# Altium PCB PCB1.PcbDoc
Units mil, origin at the board's own origin, x right, y up, seen from the top; angles counter-clockwise.
Board outline 3149.61 x 2952.76 mil, 2 copper layers (Top Layer, Bottom Layer); 97 components, 51 nets, 233 pads, 52 vias.
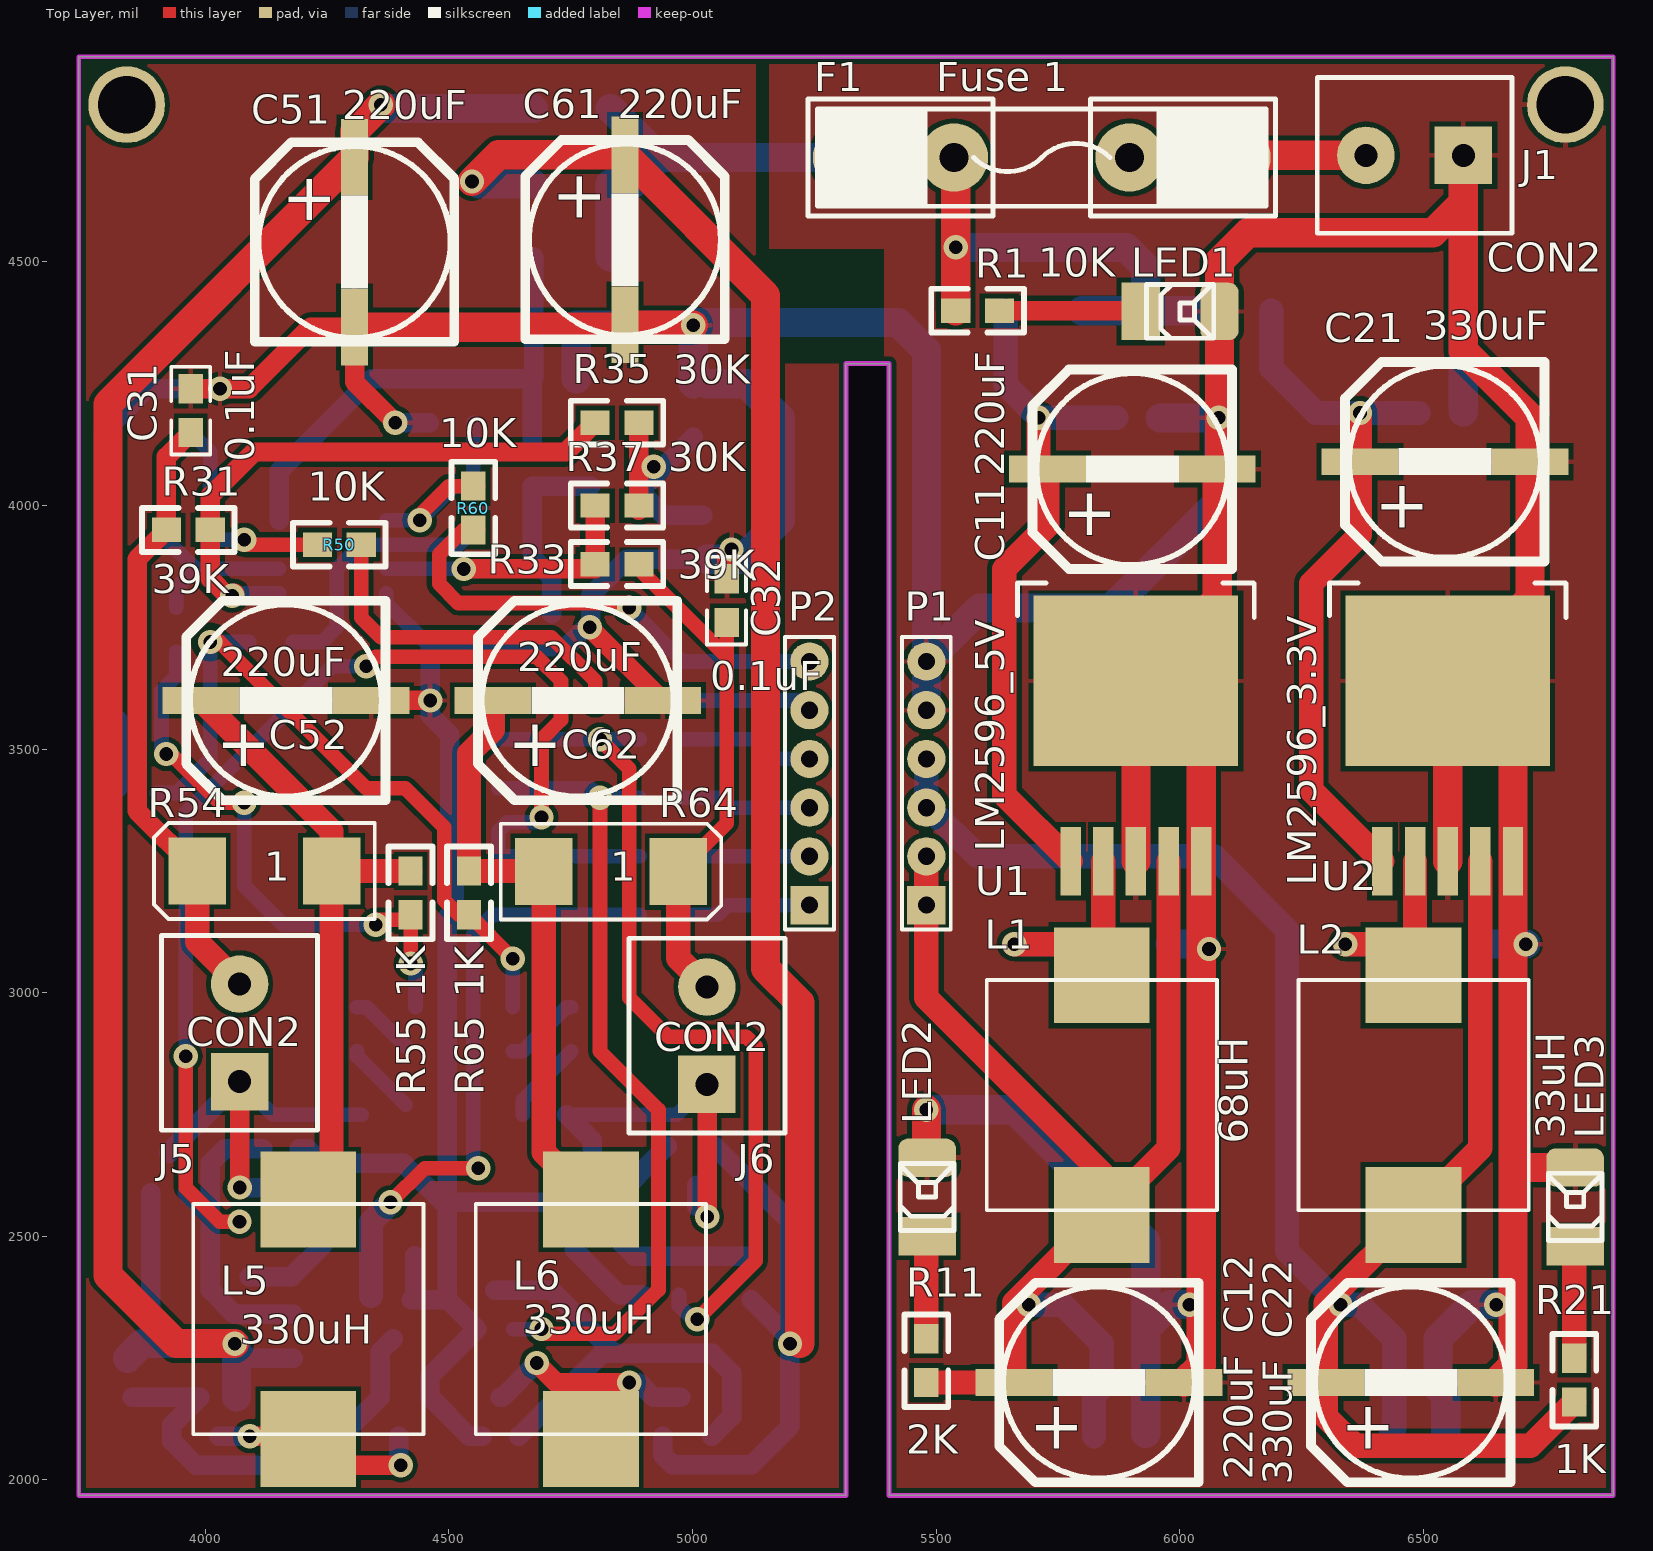
[diagram p0: Top Layer view]
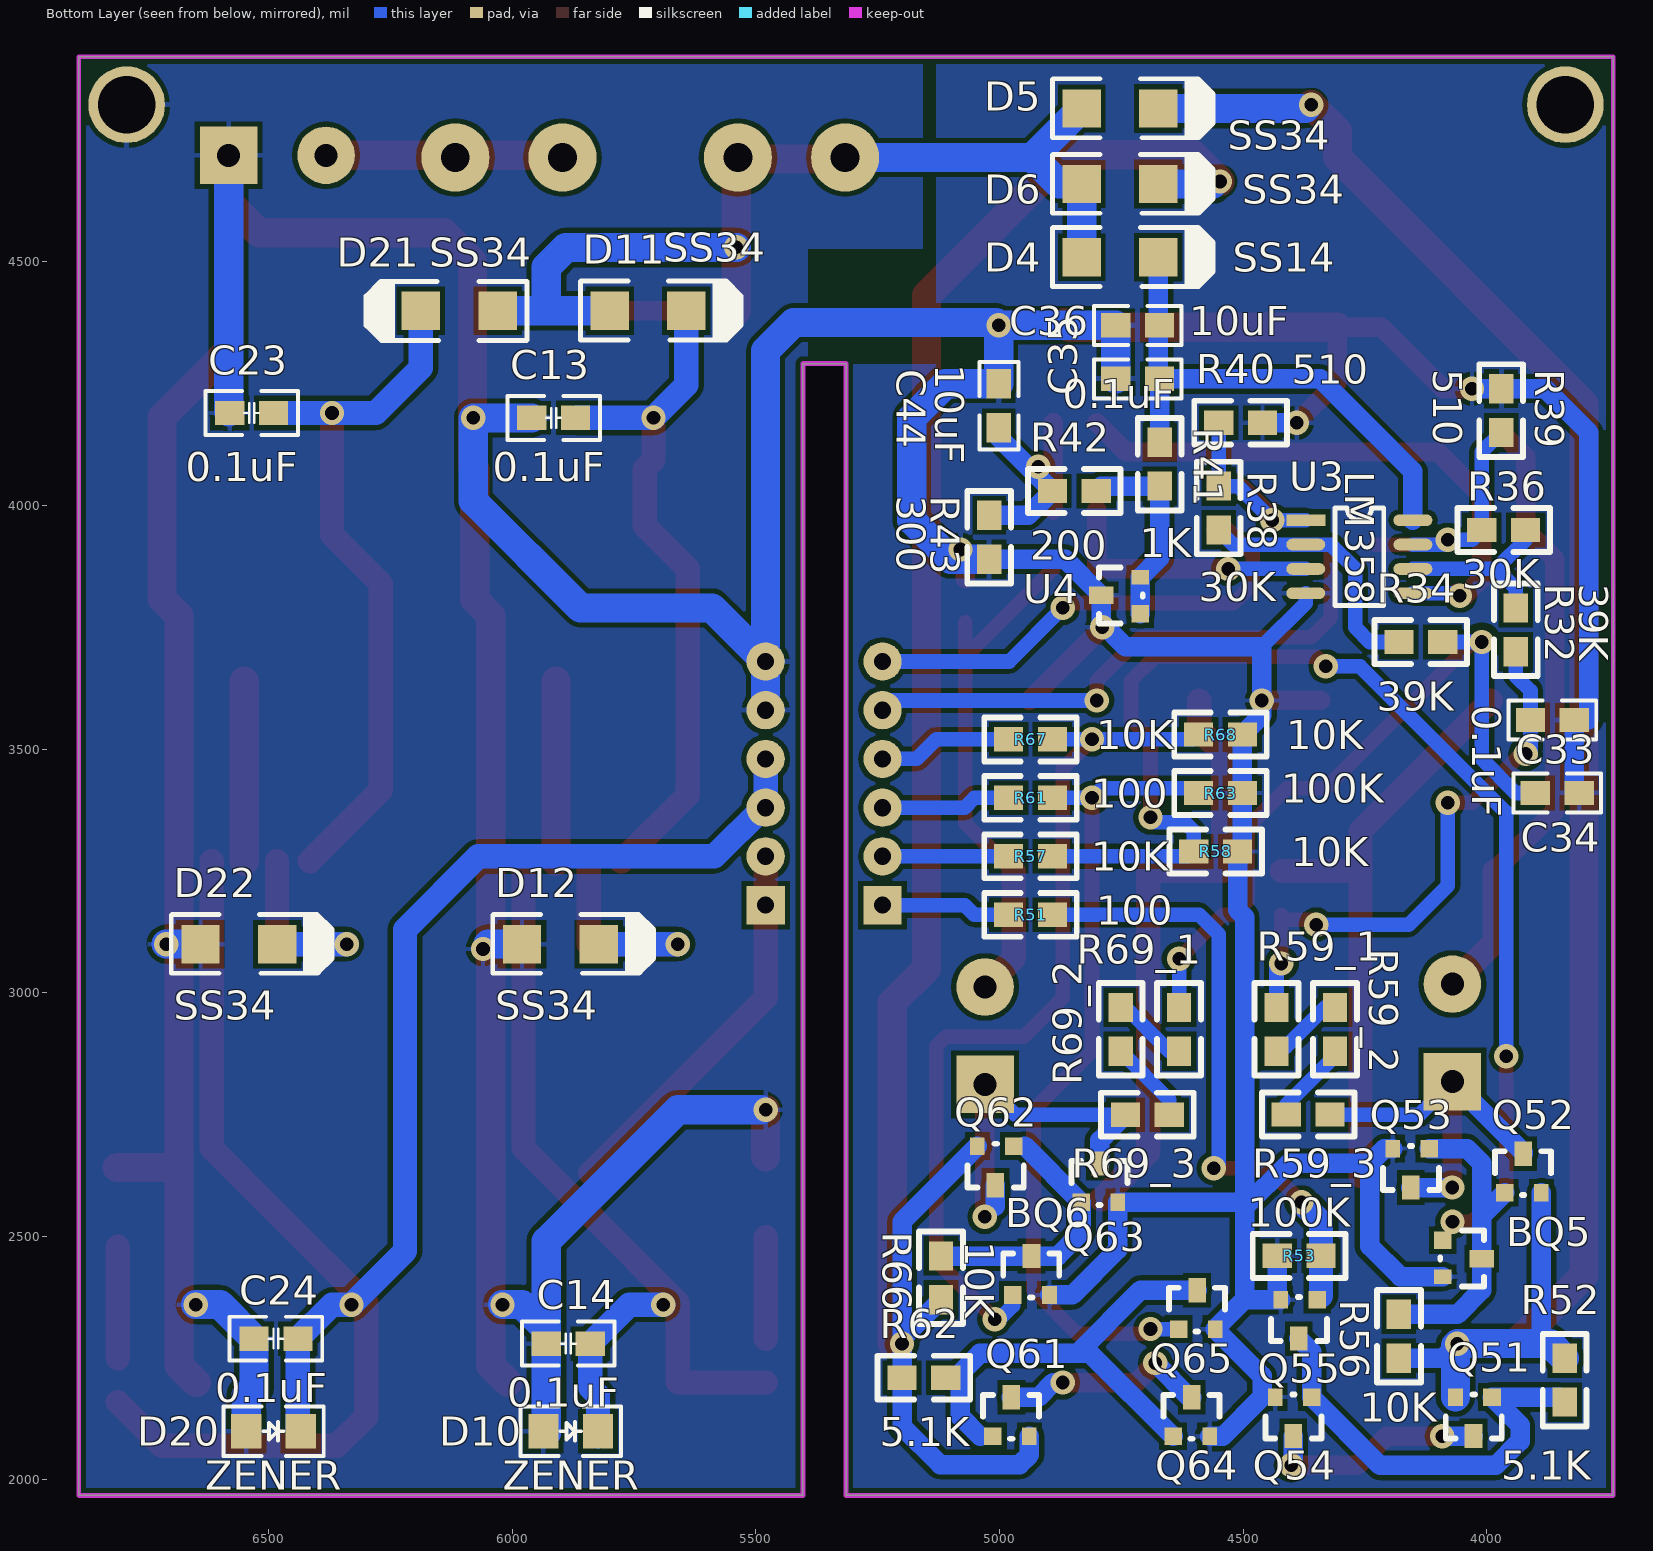
[diagram p1: Bottom Layer view, seen from below]

## Layer stack, top to bottom
Top Solder: solder mask 0.4, Solder Resist, Dk 3.5
Top Layer: signal copper 1.4
Dielectric 1: dielectric 12.6, FR-4, Dk 4.8
Bottom Layer: signal copper 1.4
Bottom Solder: solder mask 0.4, Solder Resist, Dk 3.5

## Board outline
3740.16,1968.5 3740.16,4921.26 6889.76,4921.26 6889.76,1968.5 5403.54,1968.5 5403.54,4291.34 5314.96,4291.34 5314.96,1968.5

## Design rules (kind name [scope] priority, off if disabled: settings)
Clearance [All] p1: gap=10
PolygonConnect [All] p1: connectstyle=Relief reliefconductorwidth=10 reliefentries=4 polygonreliefangle="90 Angle" airgapwidth=10
RoutingVias [All] p1: holewidth=28 width=50 viastyle="Through Hole" minholewidth=28 minwidth=50 maxholewidth=28 maxwidth=50
SolderMaskExpansion [All] p1: expansion=4
Width [All] p1: maxlimit=100 minlimit=30 preferedwidth=40
29 further rules are at their usual default settings.

## Classes and differential pairs
component class "power supply": C11 C12 C13 C14 C21 C22 C23 C24 D10 D11 D12 D20 D21 D22 F1 J1 L1 L2 LED1 LED2 LED3 P1 R1 R11 R21 U1 U2
component class motor: BQ5 BQ6 C51 C52 C61 C62 D5 D6 J5 J6 L5 L6 P2 Q51 Q52 Q53 Q54 Q55 Q61 Q62 Q63 Q64 Q65 R50 R51 R52 R53 R54 R55 R56 R57 R58 R59_1 R59_2 R59_3 R60 R61 R62 R63 R64 R65 R66 R67 R68 R69_1 R69_2 R69_3
component class analog: C31 C32 C33 C34 C35 C36 C44 D4 R31 R32 R33 R34 R35 R36 R37 R38 R39 R40 R41 R42 R43 U3 U4

## Components (designator, comment, footprint, x,y, rotation, side; value= is the part's Value field where it differs from the comment)
BQ5 "9014" SOT-23 3970,2540 r270 bottom
BQ6 "9014" SOT-23 5020,2500 r180 bottom
C11 "220uF" SMD-EC-F10 5728.35,4074.8 r0 top
C12 "220uF" SMD-EC-F10 5660,2200 r0 top
C13 "0.1uF" 0805C 5870,4180 r0 bottom
C14 "0.1uF" 0805C 5840,2280 r0 bottom
C21 "330uF" SMD-EC-F10 6370,4090 r0 top
C22 "330uF" SMD-EC-F10 6300,2200 r0 top
C23 "0.1uF" 0805C 6490,4190 r0 bottom
C24 "0.1uF" 0805C 6440,2290 r0 bottom
C31 "0.1uF" "0805 CAP" 3970,4150 r90 top
C32 "0.1uF" "0805 CAP" 5070,3760 r90 top
C33 "0.1uF" "0805 CAP" 3910,3560 r180 bottom
C34 "0.1uF" "0805 CAP" 3900,3410 r180 bottom
C35 "0.1uF" "0805 CAP" 4671.26,4260 r0 bottom
C36 "10uF" "0805 CAP" 4671.26,4370 r0 bottom
C44 "10uF" "0805 CAP" 5001.26,4160 r90 bottom
C51 "220uF" SMD-EC-F10 4306.26,4715 r270 top
C52 "220uF" SMD-EC-F10 3991.26,3600 r0 top
C61 "220uF" SMD-EC-F10 4861.26,4720 r270 top
C62 "220uF" SMD-EC-F10 4590,3600 r0 top
D4 "SS14" SMA 4831.26,4510 r180 bottom
D5 "SS34" SMA 4831.26,4815 r180 bottom
D6 "SS34" SMA 4831.26,4660 r180 bottom
D10 "ZENER" 1206D 5880,2100 r180 bottom
D11 "SS34" SMA 5800,4400.06 r180 bottom
D12 "SS34" SMA 5980,3100 r180 bottom
D20 "ZENER" 1206D 6490,2100 r180 bottom
D21 "SS34" SMA 6030,4400 r0 bottom
D22 "SS34" SMA 6640,3100 r180 bottom
F1 "Fuse 1" FUSE1 5716.77,4714.41 r180 top
J1 "CON2" con2 6480,4720 r90 top
J5 "CON2" con2 4071.26,2920 r0 top
J6 "CON2" con2 5030.47,2914.02 r0 top
L1 "68uH" 12x12 5840,2790 r90 top
L2 "33uH" 12x12 6480,2790 r90 top
L5 "330uH" 12x12 4211.26,2330 r270 top
L6 "330uH" 12x12 4791.26,2330 r270 top
LED1 "LED" "3528 led" 6050,4430 r270 top
LED2 "LED" "3528 led" 5450,2630 r0 top
LED3 "LED" "3528 led" 6780,2610 r0 top
P1 "Header 6" HDR1X6 5480,3180 r90 top
P2 "Header 6" HDR1X6 5240,3180 r90 top
Q51 "AO3407" sot-23 3941.26,2050 r0 bottom
Q52 "AO3407" sot-23 4010.51,2710 r180 bottom
Q53 "AO3406" sot-23 4070,2560 r0 bottom
Q54 "AO3406" sot-23 4311.26,2050 r0 bottom
Q55 "2N7002" sot-23 4300,2250 r0 bottom
Q61 "AO3407" sot-23 5061.26,2210 r180 bottom
Q62 "AO3407" sot-23 4922.48,2565 r0 bottom
Q63 "AO3406" sot-23 4880,2690 r180 bottom
Q64 "AO3406" sot-23 4691.26,2210 r180 bottom
Q65 "2N7002" sot-23 4680,2430 r180 bottom
R1 "10K" 0805 5630,4400 r180 top
R11 "2K" 0805 5480,2290 r270 top
R21 "1K" 0805 6810,2250 r270 top
R31 "39K" 0805 4010,3950 r180 top
R32 "39K" 0805 3940,3790 r270 bottom
R33 "39K" 0805 4800,3880 r0 top
R34 "39K" 0805 4180,3720 r180 bottom
R35 "30K" 0805 4890,4170 r180 top
R36 "30K" 0805 4010,3950.06 r180 bottom
R37 "30K" 0805 4890,4000 r180 top
R38 "30K" 0805 4550,4040 r270 bottom
R39 "510" 0805 3970,4240 r270 bottom
R40 "510" 0805 4460,4170 r0 bottom
R41 "1K" 0805 4671.26,4040 r90 bottom
R42 "200" 0805 4891.26,4030 r180 bottom
R43 "300" 0805 5021.26,3890 r90 bottom
R50 "10K" 0805 4230,3920 r0 top
R51 "100" 0805 4891.26,3160 r0 bottom
R52 "5.1K" 0805 3840,2160 r90 bottom
R53 "100K" 0805 4430,2460 r180 bottom
R54 "1" 2512 4121.26,3250 r180 top
R55 "1K" 0805 4421.26,3250 r270 top
R56 "10K" 0805 4180,2340 r270 bottom
R57 "10K" 0805 4891.26,3280 r0 bottom
R58 "10K" 0805 4511.26,3290 r0 bottom
R59_1 "0" 0805 4431.26,2970 r270 bottom
R59_2 "5.1K" 0805 4311.26,2970 r270 bottom
R59_3 "0" 0805 4321.26,2750 r0 bottom
R60 "10K" 0805 4550,4040 r270 top
R61 "100" 0805 4891.26,3400 r0 bottom
R62 "5.1K" 0805 5110,2210 r0 bottom
R63 "100K" 0805 4501.26,3410 r0 bottom
R64 "1" 2512 4832.68,3248.66 r0 top
R65 "1K" 0805 4541.26,3250 r270 top
R66 "10K" 0805 5120,2460 r270 bottom
R67 "10K" 0805 4891.26,3520 r0 bottom
R68 "10K" 0805 4501.26,3530 r0 bottom
R69_1 "0" 0805 4631.26,2970 r270 bottom
R69_2 "5.1K" 0805 4751.26,2970 r270 bottom
R69_3 "0" 0805 4741.26,2750 r180 bottom
U1 "LM2596_5V" TO-263 5910,3640 r0 top
U2 "LM2596_3.3V" to-263 6550,3640 r0 top
U3 "LM358" so-8 4371.26,3970 r180 bottom
U4 "TL431" sot-23 4831.26,3730 r90 bottom

## Footprints (in the part's own frame and the unit in brackets; to place one, negate y for a bottom-side part, rotate by r counter-clockwise, add the part's x,y. Pads: shape width x height; smd on the part's side, far side on the other; paste and mask are expansions set on the pad)
12x12 [mm]
  rect 5x5 smd: 1(-6.25,0) 2(6.25,0)
  silkscreen extent -6,-6 6,6, body extent -6.25,-6.22 6.25,6.28, height 6.7
0805 [mil]
  rect 60x50 smd: 1(0,-0.06) 2(90,-0.06)
  silkscreen extent -50,-45 140,45
"0805 CAP" [mil]
  rect 60x50 smd: 1(0,0) 2(90,0)
  silkscreen extent -45,-40 135,40, body extent 5,-24 84,24, height 37
0805C [mil]
  rect 60x50 smd: 1(0,0) 2(90,0)
  silkscreen extent -50,-45 140,45
1206D [mil]
  rect 62x70 smd: 1(-56,0) 2(56,0)
  silkscreen extent -103,-51 103,51
2512 [mm]
  rect 3x3.5 smd: 1(-3.5,0) 2(3.5,0)
  silkscreen extent -5.75,-2.5 5.75,2.5, body extent -3.27,-1.57 3.13,1.63, height 0.7
"3528 led" [mm]
  rect 3x2 smd paste+0: 1(0.8,-3.3)
  rrect50% 3x2 smd: 2(0.8,0.8)
  silkscreen extent -0.6,-3 2.2,0.5, body extent -0.7,-3.1 2.3,0.6, height 2.1
con2 [mm]
  rect 3x3 hole 1.2: 1(-0.024,-2.594)
  round 3 hole 1.2: 2(-0.024,2.486)
  silkscreen extent -4.09,-5.13 4.04,5.03, body extent -5.52,-4.95 2.48,5.05, height 11
FUSE1 [mil]
  round 140 hole 59.06: 1(-400,0) 1(-180,0) 2(180,0) 2(400,0)
  silkscreen extent -480,-120 480,120
HDR1X6 [mm] "Connector; Header; 6 Position"
  rect 2x2 hole 0.9: 1(0,0)
  round 2 hole 0.9: 2(2.54,0) 3(5.08,0) 4(7.62,0) 5(10.16,0) 6(12.7,0)
  silkscreen extent -1.27,-1.27 13.97,1.27
SMA [mm]
  rect 2x2 smd: 1(0,0) 2(4,0)
  silkscreen extent -1.52,-1.52 6.86,1.55
SMD-EC-F10 [mm]
  rect 4x1.4 smd: 1(0,0) 2(8.86,0)
  silkscreen extent -0.78,-5.2 9.62,5.2
so-8 [mil]
  rect 80x24 smd: 1(0,0)
  oval 80x24 smd: 2(0,-50) 3(0,-100) 4(0,-150) 5(220,-150) 6(220,-100) 7(220,-50) 8(220,0)
  silkscreen extent 60,-175 160,25
SOT-23 [mil]
  rect 36x36 smd: 1(47.76,-120.28)
  rect 30x36 smd: 2(122.76,-120.28)
  rect 36x50 smd: 3(85.76,-40.28)
  silkscreen extent 28,-125 143,-35
sot-23 [mil]
  rect 36x36 smd: 1(47.76,-120.28)
  rect 30x36 smd: 2(122.76,-120.28)
  rect 36x50 smd: 3(85.76,-40.28)
  silkscreen extent 28,-125 143,-35
TO-263 [mil]
  rect 42x140 smd: 1(-134,-370) 2(-67,-370) 3(0,-370) 4(67,-370) 5(134,-370)
  rect 420x350 smd: 3(0,0)
  silkscreen extent -243,130 243,201
to-263 [mil]
  rect 42x140 smd: 1(-134,-370) 2(-67,-370) 3(0,-370) 4(67,-370) 5(134,-370)
  rect 420x350 smd: 3(0,0)
  silkscreen extent -243,130 243,201

## Part data
BQ5 BQ6: "transistor"
C11 C12 C21 C22 C51 C52 C61 C62: library part "Electrolytic CAP"
C13 C14 C23 C24 C31 C32 C33 C34 C35 C36 C44: library part CAP
D4: "Diode"
D5 D6 D11 D12 D21 D22: library part SS14, "Diode"
F1: "Fuse"
L1 L2 L5 L6: library part Inductance
P1 P2: "Header, 6-Pin"
R1 R11 R21 R31 R32 R33 R34 R35 R36 R37 R38 R39 R40 R41 R42 R43 R50 R51 R52 R53 R54 R55 R56 R57 R58 R59_1 R59_2 R59_3 R60 R61 R62 R63 R64 R65 R66 R67 R68 R69_1 R69_2 R69_3: library part RES, "RES"
U1 U2: library part LM2596, "IC-power"
U4: "IC"

## Free pads (board coordinates)
  round 157.48 hole 118.11: 0(3838.58,4822.83) 0(6791.34,4822.83)

## Via types
v1: diameter 50, hole 28, Top Layer to Bottom Layer, 52 vias

## Nets (pads, with @x,y where several pads share a name; then routed paths per layer and width w, separated by ;. In a path a pad name is that pad's centre, name@x,y a point inside that pad or via, vN(x,y) a via of type N, cw(c..) or ccw(c..) an arc to the next point about the centre after c; other vN are vias at no path point)
GND: BQ5.2 BQ6.2 C11.2 C12.2 C13.2 C14.2 C21.2 C22.2 C23.2 C24.2 C31.2 C32.2 C33.2 C34.2 C35.2 C36.2 C44.2 C51.2 C52.2 C61.2 C62.2 D10.1 D12.1 D20.1 D22.1 J1.1 LED1.2 LED2.2 LED3.2 P1.5 P1.6 pad.0@6791.34,4822.83 Q53.2 Q54.2 Q55.2 Q63.2 Q64.2 Q65.2 R39.1 R40.1 R43.1 R53.1 R58.1 R63.1 R68.1 U1.3 U1.5 U2.3 U2.5 U3.4 U4.3 | length 18568.8
  Top Layer w40: C31.2 v1(4030,4240) 4090,4240 4216.2,4366.2 C51.2 4306.26,4253.87 v1(4390.06,4170.06) ; C52.2 v1(4461.26,3600) ; v1(4788.8,3750) C62.2 ; C32.2 v1@5070,3900
  Top Layer w60: C51.2 C61.2@4856.26,4366.2 ; C61.2 C61.2@4865.77,4375.71 ; C61.2@4862.46,4370 v1(5001.26,4370) ; LED2.2@5480,2662.99 v1(5480,2760) ; U1.3@5910,3270 U1.3@5910,3640 ; C12.2 6044,2235.2 U1.5 6044,3774 6077.15,3807.15 C11.2 ; C11.2@6081.5,4079.15 LED1.2 6081.5,4501.5 6140,4560 6520,4560 6582.13,4622.13 ; U2.3@6550,3270 U2.3@6550,3640 ; J1.1 6582.13,4622.13 ; C22.2 6684,2235.2 U2.5 6684,3774 6718.8,3808.8 C21.2 6718.8,4181.2 6582.13,4317.87 6582.13,4622.13 ; 6685.5,2641.5 LED3.2
  Bottom Layer w30: U3.4 4371.26,3800 4461.26,3710
  Bottom Layer w40: C33.2@3790,3560 3790,4150 3880,4240 R39.1 v1(4030,4240) ; C34.2@3820,3420 C33.2 ; BQ5.2 4177.24,2417.24 4240,2480 4240,2650 ; Q53.2 4209.72,2680.28 4240,2650 ; v1(4390.06,4170.06) R40.1 ; Q55.2 4496.69,2370.28 ; Q55.2@4430,2377.52 R53.1 ; 4506.41,2569.72 Q63.2 4757.24,2472.76 4850.28,2379.72 BQ6.2 ; Q64.2 4541.54,2089.72 4460.98,2170.28 4460.98,2213.46 Q65.2 4496.69,2370.28 ; R43.1 4865.23,3890 U4.3 4790.98,3759.72 4741.26,3710 4461.26,3710 v1(4461.26,3600) 4461.26,3570.06 R68.1 R63.1 4501.26,3300.06 R58.1 4511.26,3170.06 4496.69,3155.49 4496.69,2560 ; 4240,2650 4406.69,2650 4496.69,2560 ; 4496.69,2370.28 4496.69,2560
  Bottom Layer w60: C35.2 C36.2 v1(5001.26,4370) ; C44.2 v1(5001.26,4370) ; R43.1@5030,3890 5100,3890 5180,3970 5180,4180 5110,4250 5030,4250 ; P1.5 P1.6 ; v1@5490,2760 5660,2760 5930,2490 5930,2310 ; D10.1@5930,2096 C14.2 5930,2310 ; C13.2 v1(6080,4180) 6080,4010 5860,3790 5590,3790 P1.6 ; D12.1 v1@6050,3100 ; v1(6020,2360) 5980,2360 5930,2310 ; D20.1 6546,2174 6530,2190 C24.2 6600,2360 v1(6650,2360) ; C23.2@6582.13,4192.13 J1.1 ; D22.1 v1(6710,3100) ; v1(5001.26,4370) 5006.97,4375.71 5422.18,4375.71 5480,4317.89 P1.6
  other v1: 6060,3090 5080,3910
"M1 CUR": C31.1 J5.2 R31.2 R54.2 | length 1264.8
  Top Layer w40: C31.1 3920,4100 R31.2 3860,3890.06 3860,3373.46 R54.2
  Top Layer w50: R54.2 3983.46,3104.72 J5.2
"M1 DIR": P2.2 R57.2 | length 258.7
  Bottom Layer w30: R57.2 P2.2
"M1 PWM": P2.1 R51.2 | length 267
  Bottom Layer w30: R51.2 5051.32,3160.06 5071.26,3180 P2.1
"M1 S": R36.1 R39.2 R50.1 U3.7 | length 526
  Top Layer w30: v1@4080.06,3919.94 R50.1
  Bottom Layer w30: R39.2 4010,4110.06 R36.1 4030,3930 v1(4080,3930) 4080,3920 U3.7
"M1 VOL": C33.1 R32.2 R55.2 R59_1.1 | length 1142.2
  Top Layer w30: v1(3920,3490) 3930,3490 4030,3390 v1@4070,3390 ; v1@4350,3150 4411.2,3150 R55.2 ; v1(4421.26,3060) R55.2@4421.26,3159.94
  Bottom Layer w30: v1@3910,3500 C33.1 3910,3620 3940.06,3650.06 R32.2 ; v1(4080,3390) 4080,3220 4160,3140 v1(4350,3140) ; R59_1.1 v1@4431.32,3059.94
"M2 CUR": C32.1 J6.2 R33.2 R64.2 | length 1068.4
  Top Layer w30: R33.2@4890,3869.94 5070,3689.94 ; R64.2 5070,3348.19 5070,3689.94 ; C32.1 5070,3689.94
  Top Layer w50: R64.2 4970.47,3070.94 J6.2
"M2 DIR": P2.4 R67.2 | length 275.3
  Bottom Layer w30: R67.2 5129.94,3520.06 5170,3480 P2.4
"M2 PWM": P2.3 R61.2 | length 267.1
  Bottom Layer w30: R61.2 5051.2,3400.06 5071.26,3380 P2.3
"M2 S": R38.1 R40.2 R60.1 U3.1 | length 506.7
  Top Layer w30: v1(4440,3970) 4430,3970 4500,4040 R60.1 R60.1@4559.94,4040
  Bottom Layer w30: U3.1 v1(4440,3970) 4510,4040 R38.1 R40.2@4550.06,4170
"M2 VOL": C34.1 R34.2 R65.2 R69_1.1 | length 1527.2
  Top Layer w30: v1(4010,3720) 4030,3720 4330,3420 4410,3420 4490,3340 4490,3190 4520,3160 R65.2 v1@4631.2,3070
  Bottom Layer w30: C34.1 3940,3410 4010,3480 v1(4010,3720) R34.2@4089.94,3720 ; R69_1.1 v1@4631.32,3059.94
  other v1: 4631.26,3070
NetBQ5_b: BQ5.1 R57.1 R58.2 | length 2536.5
  Top Layer w30: v1(3960,2870) 3960,2600 4030,2530 v1(4070,2530) ; v1(4330,3670) 4350,3690 4680,3690 4730,3640 4730,3560 4690,3520 v1(4690,3360)
  Bottom Layer w30: v1(3960,2870) 3960,3370 4260,3670 v1(4330,3670) ; R58.2 4601.26,3331.26 4620,3350 v1@4680,3350 ; R58.2@4611.26,3280.06 R57.1
NetBQ5_c: BQ5.3 Q52.1 Q53.1 R56.1 | length 638
  Bottom Layer w40: Q52.1 4010.28,2542.2 ; Q53.1 4040.28,2680.28 4010.28,2650.28 4010.28,2542.2 ; R56.1 4060,2340 4010.28,2389.72 BQ5.3 4010.28,2542.2
NetBQ6_b: BQ6.1 R67.1 R68.2 | length 1799.2
  Top Layer w30: v1(4810,3520.06) 4870,3460.06 4870,2990 4950,2910 5110,2910 5130,2890 5130,2450 v1@5020,2340
  Bottom Layer w30: R68.2@4601.26,3520.06 v1(4810,3520.06) R67.1 ; BQ6.1 4972.24,2357.76 v1@4997.24,2332.76
  other v1: 5010,2330
NetBQ6_c: BQ6.3 Q62.1 Q63.1 R66.1 | length 532.8
  Bottom Layer w40: 4947.8,2685.28 Q63.1 4832.24,2507.76 4880.28,2459.72 BQ6.3 R66.1@5119.79,2459.72
NetC11_1: C11.1 C13.1 D11.2 U1.1 | length 1418.5
  Top Layer w50: v1(5710,4180) 5710,4093.15 C11.1 5728.35,3958.35 5640,3870 5640,3406 U1.1
  Bottom Layer w50: D11.2 5642.52,4247.48 v1(5710,4180) C13.1
NetC21_1: C21.1 C23.1 D21.2 U2.1 | length 1480.2
  Top Layer w50: v1(6370,4190) C21.1 6370,3940 6270,3840 6270,3416 U2.1
  Bottom Layer w50: D21.2 6187.48,4282.52 6280,4190 v1(6370,4190) C23.1
NetC35_1: C35.1 C36.1 D4.2 R41.2 U3.8 | length 1076.1
  Bottom Layer w40: U3.8 4151.26,4070 4341.26,4260 C35.1 R41.2@4671.26,4130.06 ; C35.1@4673.78,4262.52 D4.2
NetC51_1: C51.1 D5.2 Q51.2 Q52.2 R52.2 R56.2 | length 4017.2
  Top Layer w60: v1(4060,2280) 3940,2280 3800,2420 3800,4208.74 C51.1 4306.26,4768.86 v1(4360.24,4822.83)
  Bottom Layer w40: 3887.76,2297.82 Q52.2 ; v1(4060,2280) 4064.01,2275.99 4090,2250 R56.2
  Bottom Layer w60: R52.2 3869.94,2280 v1(4060,2280) ; Q51.2 v1@4064.01,2275.99 ; v1@4372.09,4815 D5.2
NetC52_1: C52.1 L5.1 R54.1 R55.1 | length 1249.2
  Top Layer w50: C52.1 4259.06,3332.2 R54.1 ; L5.1@4259.06,2623.86 R54.1 ; R55.1 R54.1
NetC61_1: C61.1 D6.2 Q61.2 Q62.2 R62.2 R66.2 | length 4130.4
  Top Layer w60: v1(4547.24,4665.35) 4601.89,4720 C61.1 5150,4431.26 5150,3050 5220,2980 v1@5220,2280
  Bottom Layer w40: Q61.2 4938.5,2051.5 4958.5,2031.5 5121.5,2031.5 5200,2110 R62.2 v1(5200,2280) v1@5200,2290.06 ; Q62.2 5200,2530.51 v1@5200,2290.06 ; R66.2 v1@5200,2290.06
  Bottom Layer w60: v1@4561.57,4660 D6.2
NetC62_1: C62.1 L6.1 R64.1 R65.1 | length 1235.1
  Top Layer w50: C62.1 4590,3540 4541.2,3491.2 R65.1 R64.1@4693.54,3250 ; R64.1 4694.88,2672.44 L6.1
NetD12_2: D12.2 L1.2 U1.2 | length 515.5
  Top Layer w50: v1(5660,3100) 5843,3100 U1.2
  Bottom Layer w50: v1(5660,3100) D12.2
NetD22_2: D22.2 L2.2 U2.2 | length 455.5
  Top Layer w50: v1(6340,3100) 6483,3100 U2.2
  Bottom Layer w50: v1(6340,3100) D22.2
NetF1_1: F1.1 J1.2 | length 487.3
  Top Layer w60: F1.1@5906.05,4714.41 5901.41,4719.05 J1.2
NetJ5_1: J5.1 Q52.3 Q53.3 R59_3.1 | length 790.5
  Top Layer w40: v1(4070.28,2600.28) J5.1
  Bottom Layer w30: J5.1 4138.12,2750.06 R59_3.1
  Bottom Layer w40: Q52.3 3924.76,2672.32 J5.1 ; v1(4070.28,2600.28) Q53.3
NetJ6_1: J6.1 Q62.3 Q63.3 R69_3.1 | length 716.9
  Top Layer w40: v1@5030,2560 J6.1@5030,2811.41
  Bottom Layer w30: R69_3.1 4967.57,2749.94 J6.1
  Bottom Layer w40: R69_3.1 4784.24,2706.95 ; Q63.3 4794.24,2696.95 ; 5008.23,2561.77 Q62.3
  other v1: 5030,2540
NetL5_2: L5.2 Q51.3 Q54.3 | length 433.3
  Top Layer w40: v1(4091.26,2090) 4205.2,2090 L5.2 4265.2,2030 v1(4401.26,2030)
  Bottom Layer w40: Q51.3 v1@4080.98,2090.28 ; v1@4397.01,2045.76 Q54.3
NetL6_2: L6.2 Q61.3 Q64.3 | length 428.2
  Top Layer w40: v1(4680,2240) 4720,2200 v1(4870,2200)
  Bottom Layer w40: Q64.3 4609.72,2169.72 v1(4680,2240) ; v1(4870,2200) 4890,2200 4920.28,2169.72 Q61.3
NetLED1_1: LED1.1 R1.1 | length 288.5
  Top Layer w40: R1.1 LED1.1@5918.52,4400.06
NetLED2_1: LED2.1 R11.1 | length 208.5
  Top Layer w50: R11.1 LED2.1@5479.94,2498.52
NetLED3_1: LED3.1 R21.1 | length 228.5
  Top Layer w50: R21.1 LED3.1@6809.94,2478.52
NetP2_5: P2.5 R50.2 | length 1162.1
  Top Layer w30: R50.2 4320,3770 4360,3730 4710,3730 4800,3640 v1@4800,3610
  Bottom Layer w30: v1(4800,3600) 5220,3600 P2.5
NetP2_6: P2.6 R60.2 | length 983.1
  Top Layer w30: R60.2@4559.94,3950 4530,3950 4480.06,3900.06 4480.06,3839.29 4519.35,3800 v1@4870,3800
  Bottom Layer w30: v1(4870,3790) 4980,3680 P2.6
NetQ51_1: Q51.1 Q54.1 Q55.3 R52.1 | length 890.6
  Bottom Layer w40: R52.1@3850.21,2170.28 Q51.1 3931.26,2112.52 3931.26,2080 3981.26,2030 4218.74,2030 Q54.1 4359.01,2263.54 Q55.3
NetQ55_1: Q55.1 R51.1 R53.2 | length 1231.2
  Top Layer w30: v1(4380,2570) 4450,2640 v1(4560,2640)
  Bottom Layer w30: v1@4550,2650 4550,3120 4590.06,3160.06 R51.1
  Bottom Layer w50: Q55.1@4340,2378.03 R53.2 4340,2530 v1@4370,2560
NetQ61_1: Q61.1 Q64.1 Q65.3 R62.1 | length 1170
  Bottom Layer w40: Q65.3 4710.28,2389.72 4840,2260 5040,2260 ; Q64.1 4813.78,2260 5040,2260 ; 5039.72,2089.72 5080,2130 5080,2220 5040,2260
NetQ65_1: Q65.1 R61.1 R63.2 | length 1692.8
  Top Layer w30: v1@4690,2300 4840,2300 4930,2390 4930,2760 4810,2880 v1@4810,3400.06
  Bottom Layer w30: R63.2@4601.2,3420 4790,3420 v1(4809.94,3400.06) R61.1 ; Q65.1 v1@4689.72,2309.72
  other v1: 4690,2310
NetR31_1: R31.1 R35.2 U3.5 | length 1170
  Top Layer w40: v1@4060,3820 v1(4055,3815) 4045,3815 4010,3850 R31.1 4010,4020 4100,4110 4739.94,4110 R35.2
  Bottom Layer w30: v1@4070,3820 U3.5
NetR32_1: R32.1 R36.2 U3.6 | length 372.7
  Bottom Layer w30: R36.2 3920,3930 3980,3870 ; R32.1 3940.06,3830.06 3980,3870 ; U3.6 3980,3870
NetR33_1: R33.1 R37.2 U3.3 | length 548.9
  Top Layer w40: v1(4530.06,3869.94) 4800,3869.94 R37.2@4800,3990.06
  Bottom Layer w30: U3.3 v1@4530,3870
  Bottom Layer w40: v1@4530,3870 v1(4530.06,3869.94)
NetR34_1: R34.1 R38.2 U3.2 | length 535.7
  Bottom Layer w30: R34.1 4239.94,3719.94 4270,3750 4270,3870 4320,3920 U3.2 4520.06,3920 R38.2
NetR41_1: R41.1 R42.2 U4.1 U4.2 | length 398.7
  Bottom Layer w40: U4.1 U4.2 4671.2,3892.54 R41.1 R42.2@4791.2,4040
NetR59_1_2: R59_1.2 R59_2.1 | length 133.4
  Bottom Layer w30: R59_2.1 4331.26,2970 R59_1.2@4411.47,2889.79
NetR59_2_2: R59_2.2 R59_3.2 | length 151.4
  Bottom Layer w30: R59_2.2 4311.32,2869.94 R59_3.2@4411.26,2770
NetR69_1_2: R69_1.2 R69_2.1 | length 157.3
  Bottom Layer w30: R69_1.2 4651.26,2880 4741.26,2970 R69_2.1
NetR69_2_2: R69_2.2 R69_3.2 | length 171.5
  Bottom Layer w30: R69_3.2 4651.26,2779.94 R69_2.2
VCC_3.3V: C22.1 C24.1 D20.2 L2.1 P1.3 P1.4 R21.2 U2.4 | length 3934
  Top Layer w50: U2.4 6617,2680.94 L2.1 6300,2363.94 C22.1 6300,2130 6360,2070 6719.94,2070 R21.2
  Bottom Layer w50: P1.4 P1.3 5485.18,3380 5585.18,3280 6070,3280 6220,3130 6220,2470 v1(6330,2360) 6370,2360 C24.1 6440,2106 D20.2
VCC_5V: C12.1 C14.1 D10.2 L1.1 P1.1 P1.2 R11.2 U1.4 | length 2560.3
  Top Layer w50: R11.2 C12.1 5660,2363.94 L1.1 5977,2680.94 U1.4 ; P1.2 P1.1 5480,2990 L1.1@5840,2630
  Bottom Layer w50: v1(5690,2360) 5760,2360 C14.1 5840,2190 5824,2174 D10.2@5824,2090
VCC_12V: D4.1 D5.1 D6.1 D11.1 D21.1 F1.2 R1.2 | length 2057.9
  Top Layer w60: F1.2@5320,4711.18 5540,4711.18 R1.2
  Bottom Layer w60: D4.1 D6.1 4877.44,4660 4931.85,4714.41 ; D5.1 4931.85,4714.41 ; F1.2@5316.77,4714.41 4931.85,4714.41 ; v1(5540,4530) 5890,4530 5930,4490 5930,4400.06 ; D11.1 5930,4400.06 ; D21.1@6029.94,4400.06 5930,4400.06
VOLREF_1.5V: C44.1 R35.1 R37.1 R42.1 R43.2 | length 486.2
  Top Layer w40: R37.1@4890,3990.06 R35.1
  Bottom Layer w40: C44.1@5001.26,4139.94 R42.1 4941.2,3980 R43.2
  other v1: 4920,4080

## Polygon pours and split planes (outlines as drawn)
GND on Bottom Layer "Bottom Layer-GND" (solid, remove dead copper, pour order 4): 6889.76,1968.5 5393.7,1968.5 5393.7,4527.56 5157.48,4527.56 5157.48,4921.26 6889.76,4921.26
GND on Bottom Layer "Bottom Layer-GND" (solid, remove dead copper, pour order 12): 5314.96,1968.5 5314.96,4291.34 5313.62,4290 5130,4290 5130,4921.26 5121.26,4930 3730,4930 3730,1978.66 3740.16,1968.5
GND on Top Layer "Top Layer-GND" (solid, remove dead copper, pour order 8): 6889.76,1968.5 5403.54,1968.5 5393.7,1978.35 5393.7,4527.56 5157.48,4527.56 5157.48,4921.26 6889.76,4921.26
GND on Top Layer "Top Layer-GND" (solid, remove dead copper, pour order 14): 5314.96,1968.5 3740.16,1968.5 3740.16,4921.26 5130,4921.26 5130,4290 5131.34,4291.34 5314.96,4291.34

## Keep-outs
Keep-Out Layer:
  the board outline again, w10

## Silkscreen, mask and mechanical layers (free items; w line width, h text height)
Mechanical 1:
  circle w10: c6791.34,4822.83 r59.06
  circle w10: c3838.58,4822.83 r59.06

## Text inside footprints (layer, text, board x,y; h text height)
C11: Top Overlay "+" at 5759.07,3939.37 h98.43
C12: Top Overlay "+" at 5690.72,2064.57 h98.43
C21: Top Overlay "+" at 6400.72,3954.57 h98.43
C22: Top Overlay "+" at 6330.72,2064.57 h98.43
C51: Top Overlay "+" at 4170.83,4684.28 h98.43 r270
C52: Top Overlay "+" at 4021.98,3464.57 h98.43
C61: Top Overlay "+" at 4725.83,4689.28 h98.43 r270
C62: Top Overlay "+" at 4620.72,3464.57 h98.43